# Altium PCB HIVE_BOARD_PANEL.PcbDoc
Units mm, origin at the board's own origin, x right, y up, seen from the top; angles counter-clockwise.
Board outline 280 x 155 mm, 8 copper layers (Top, GND_1, Signal_1, GND_2, PWR, Signal_2, GND_3, Bottom), stack 1.6 mm thick; 15 components, 55 nets, 12 pads, 0 vias.
Unrouted connection lines stored in the file: 24.
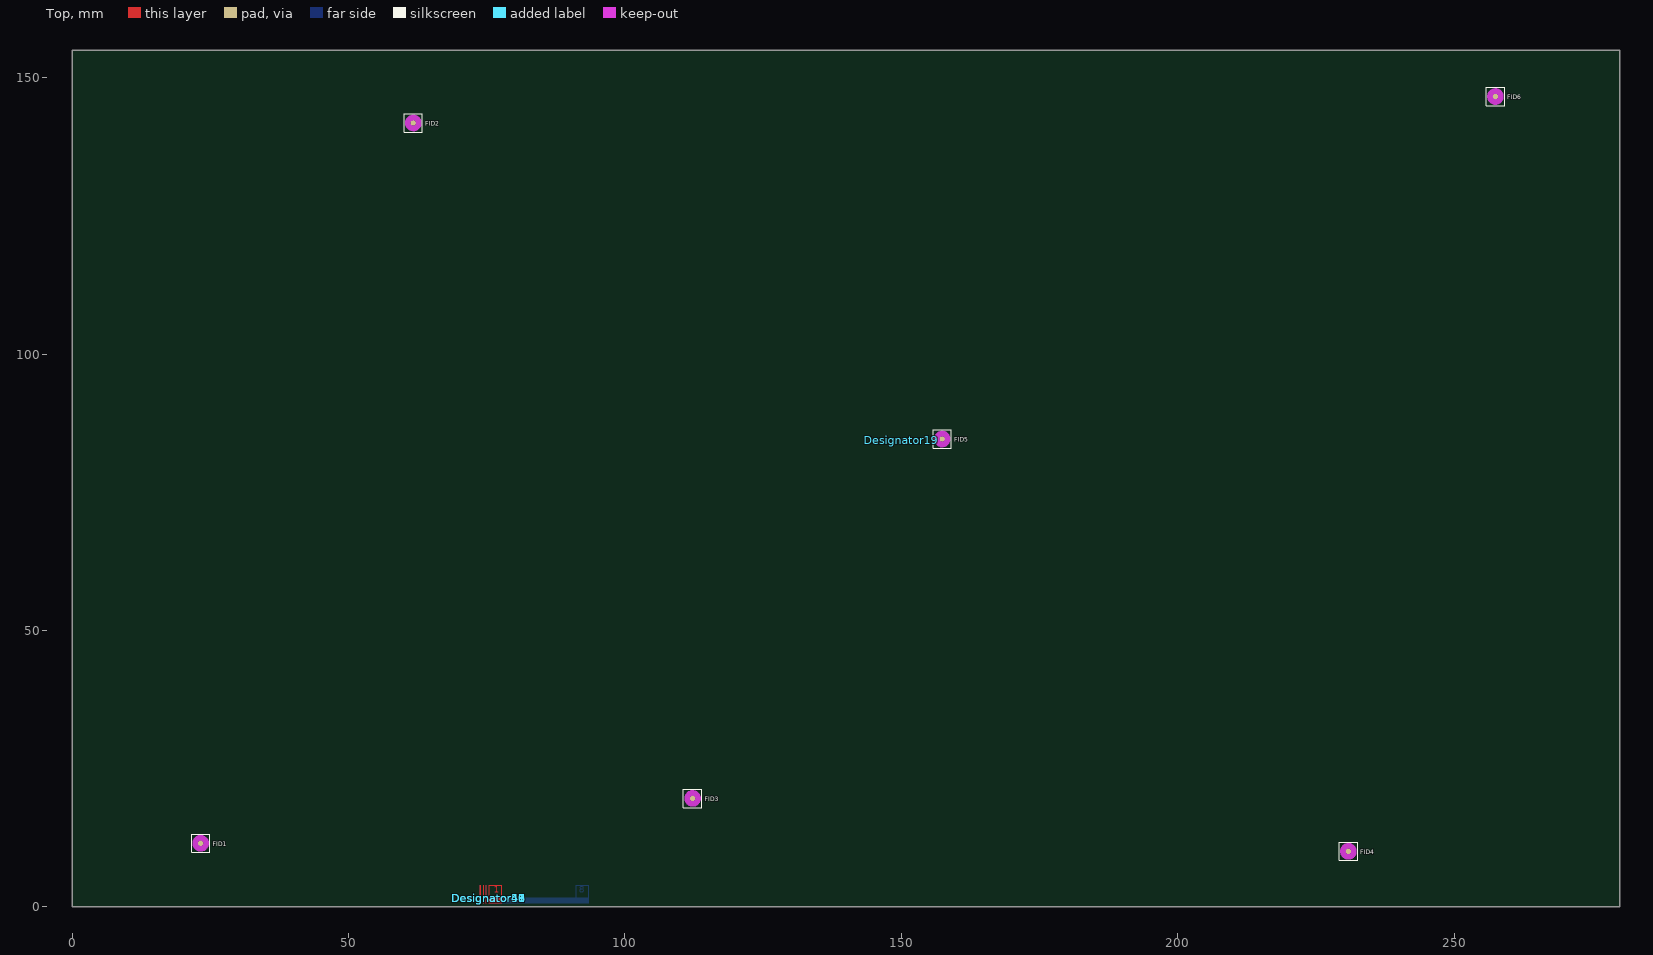
[diagram p0: Top view]
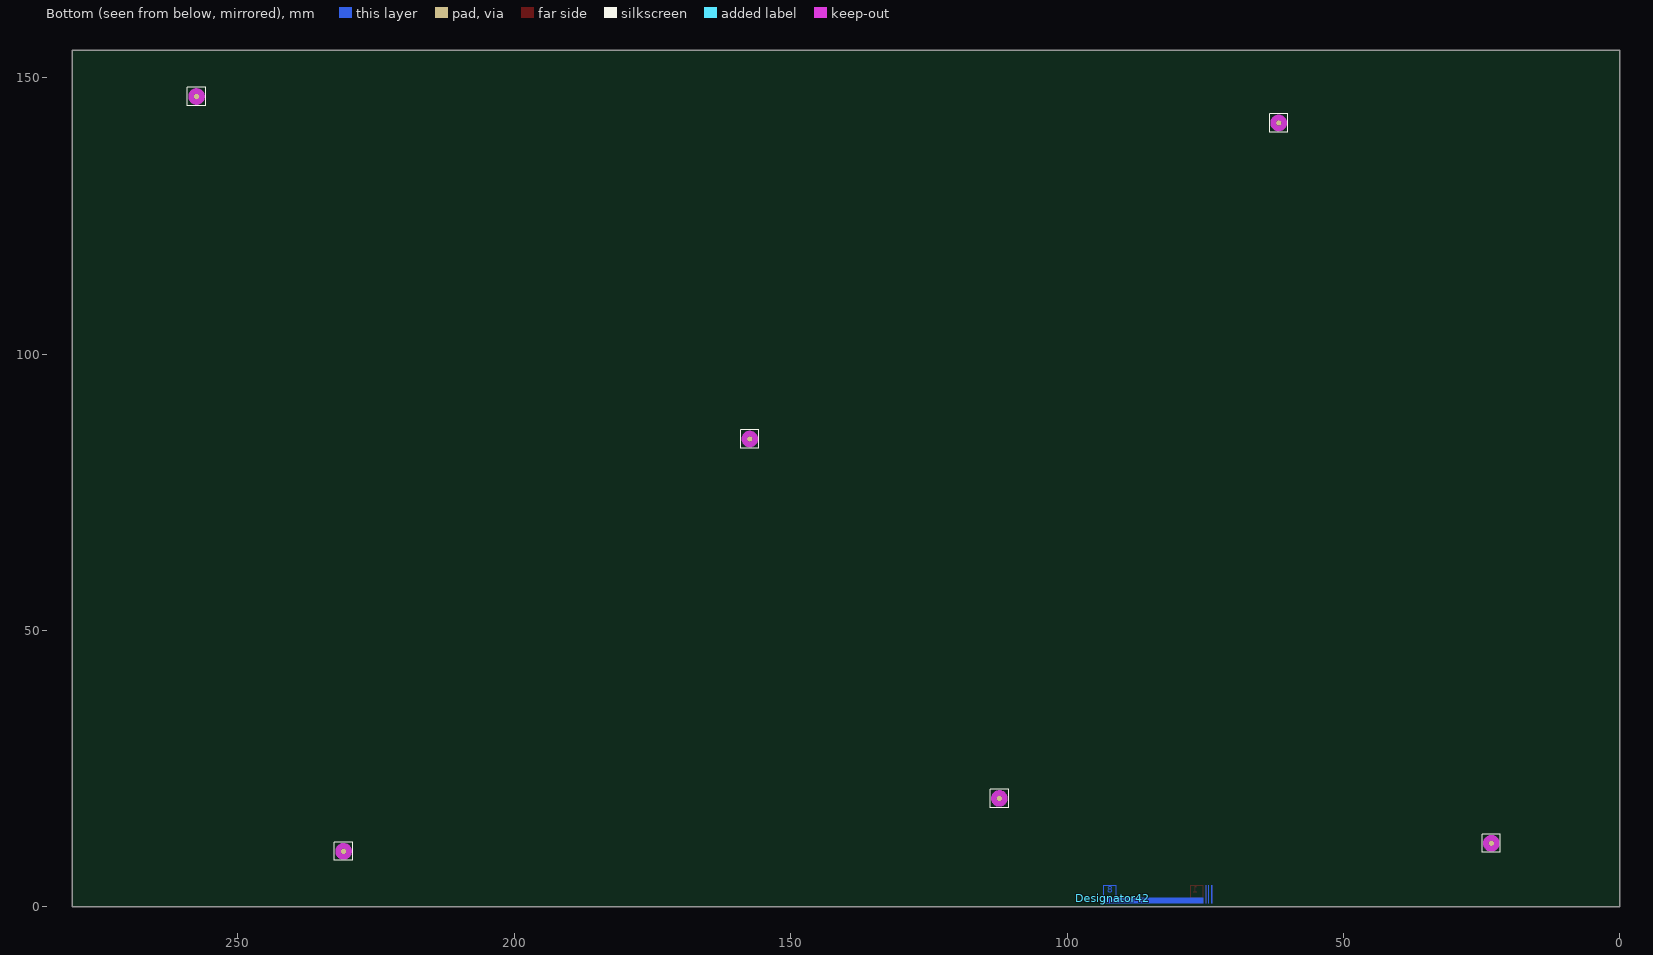
[diagram p1: Bottom view, seen from below]
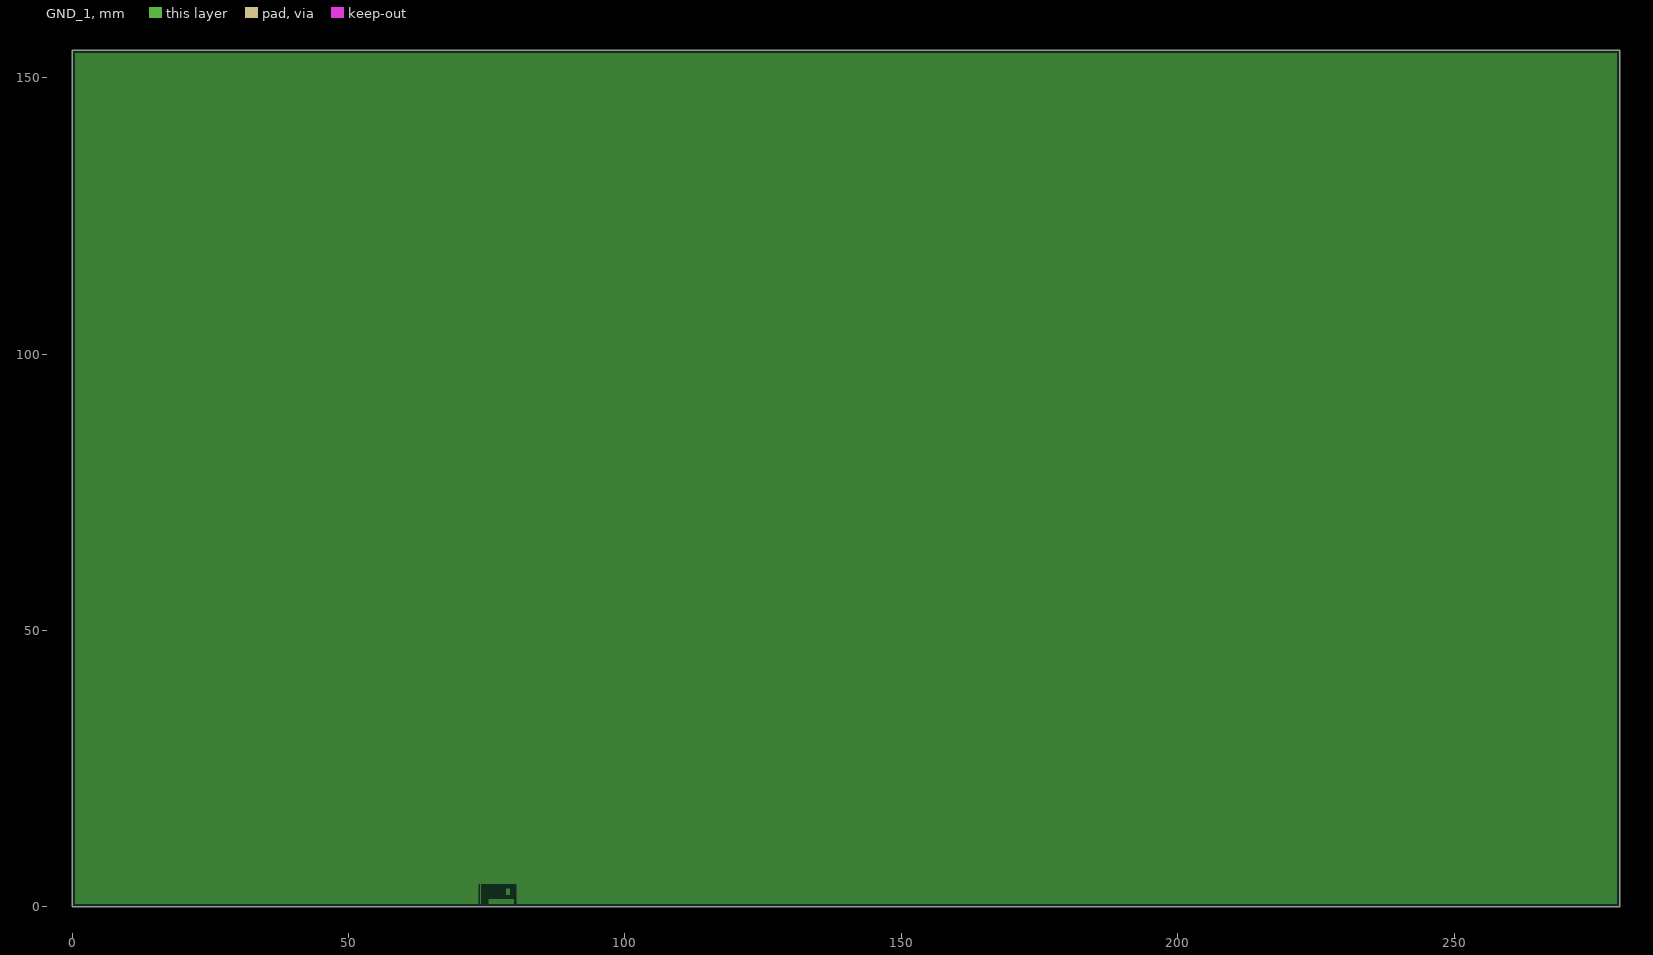
[diagram p2: GND_1, clearances drawn from the general rule]
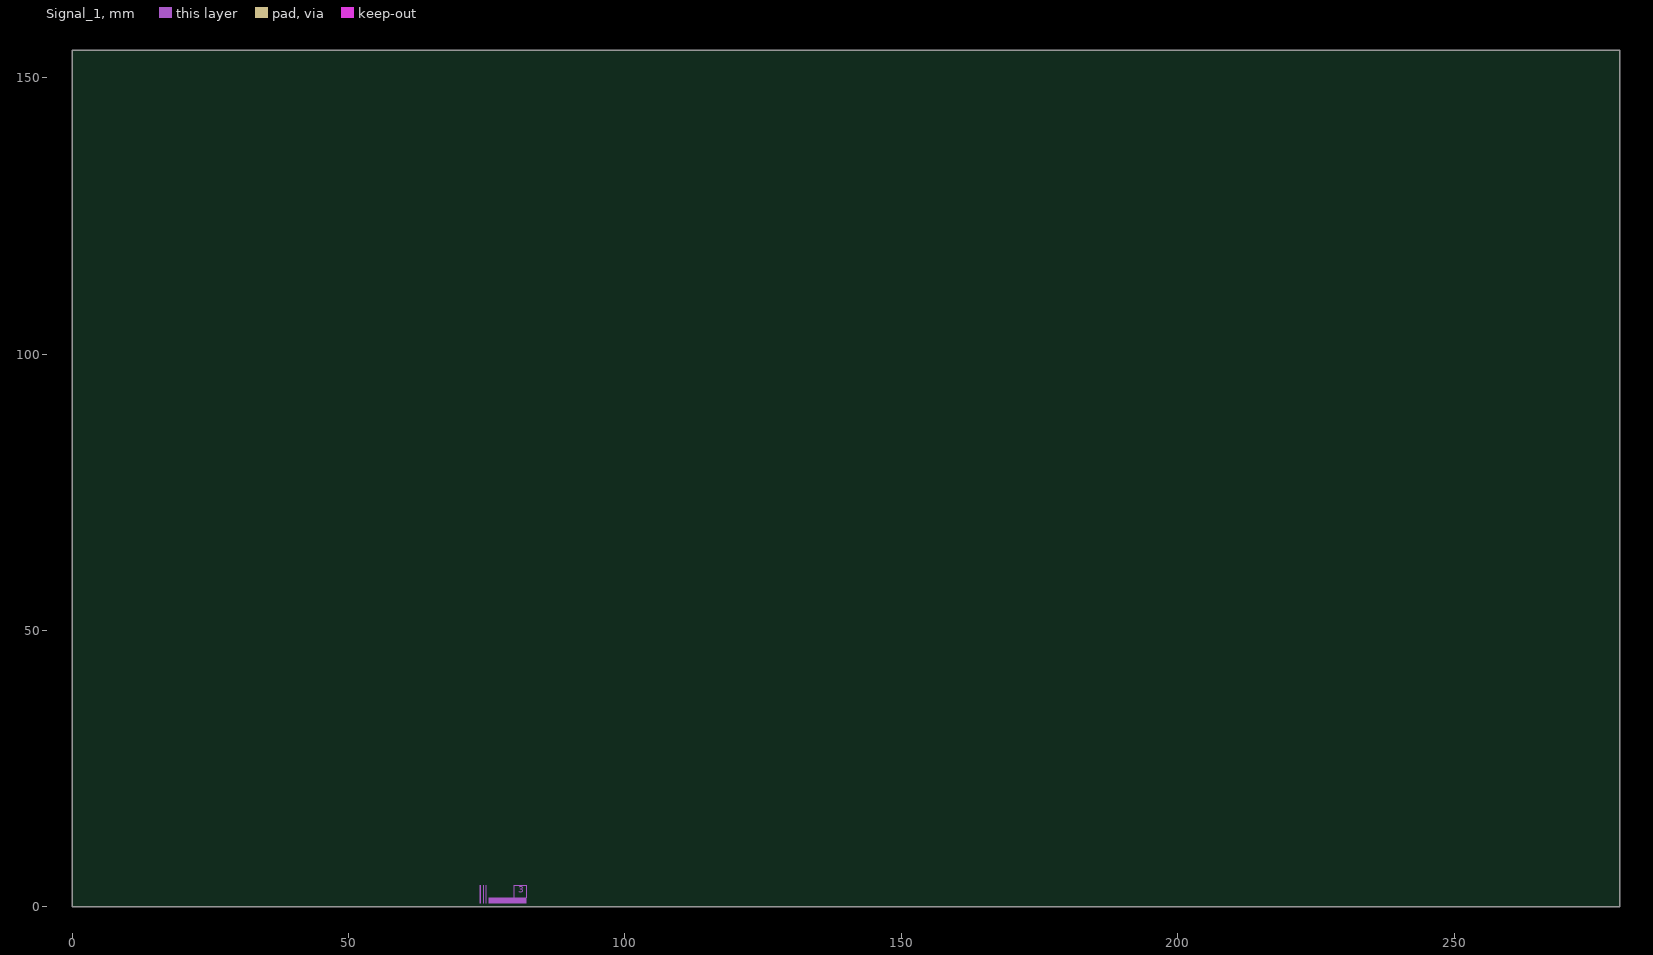
[diagram p3: Signal_1]
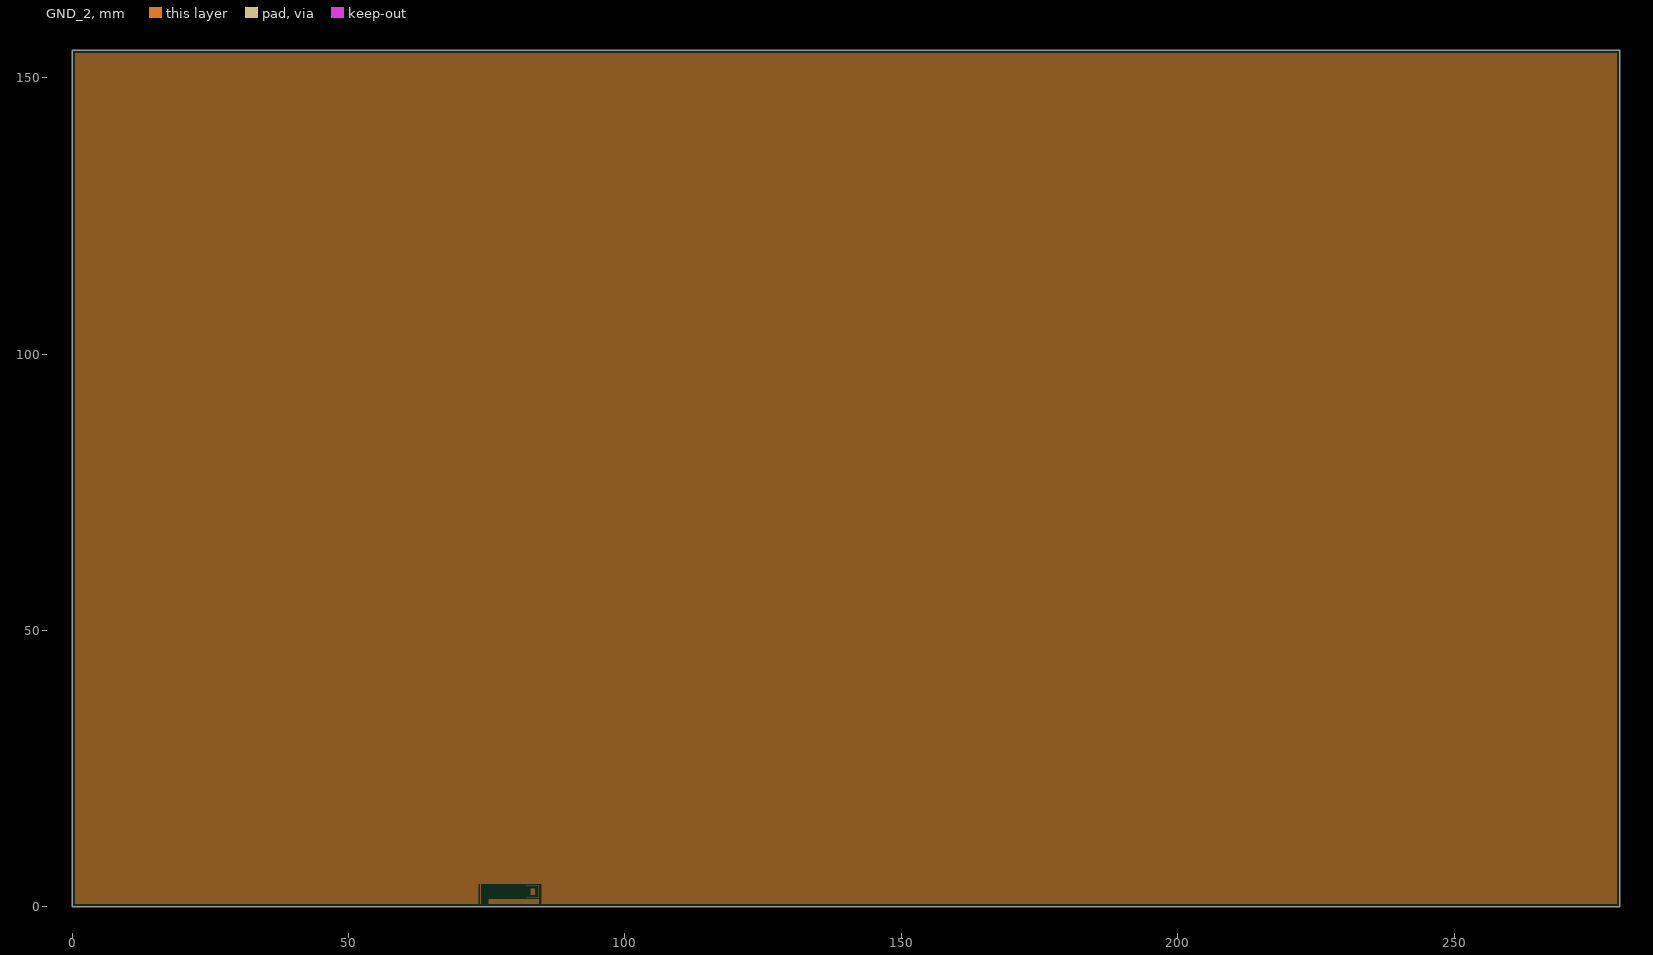
[diagram p4: GND_2, clearances drawn from the general rule]
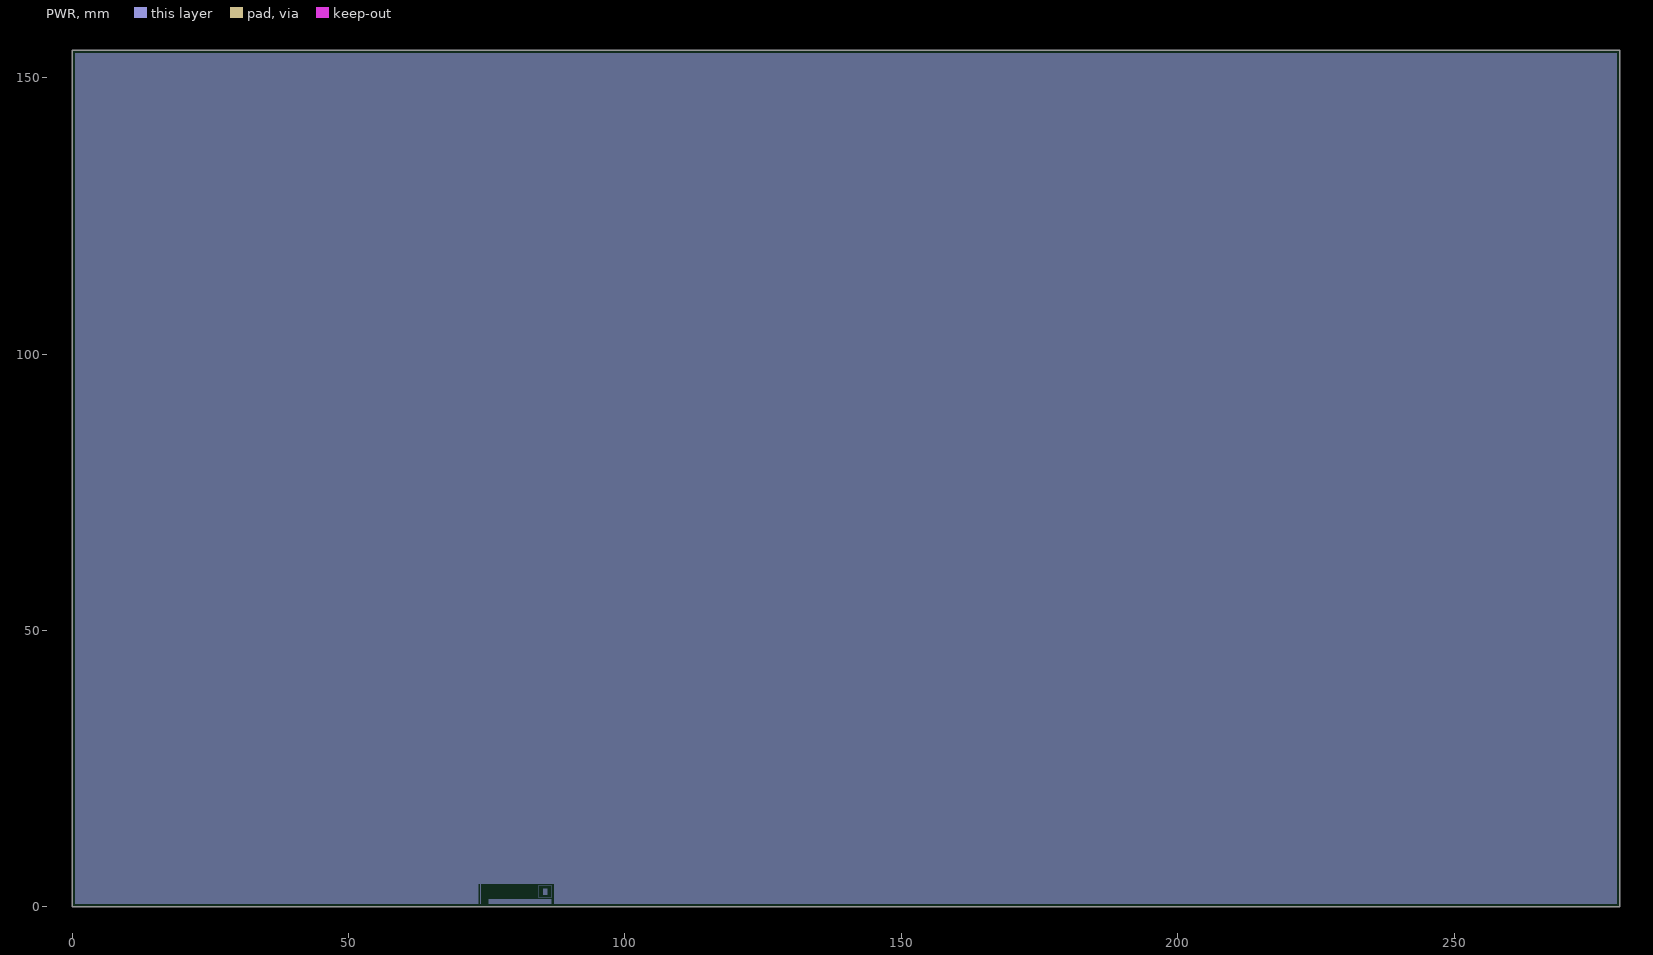
[diagram p5: PWR, clearances drawn from the general rule]
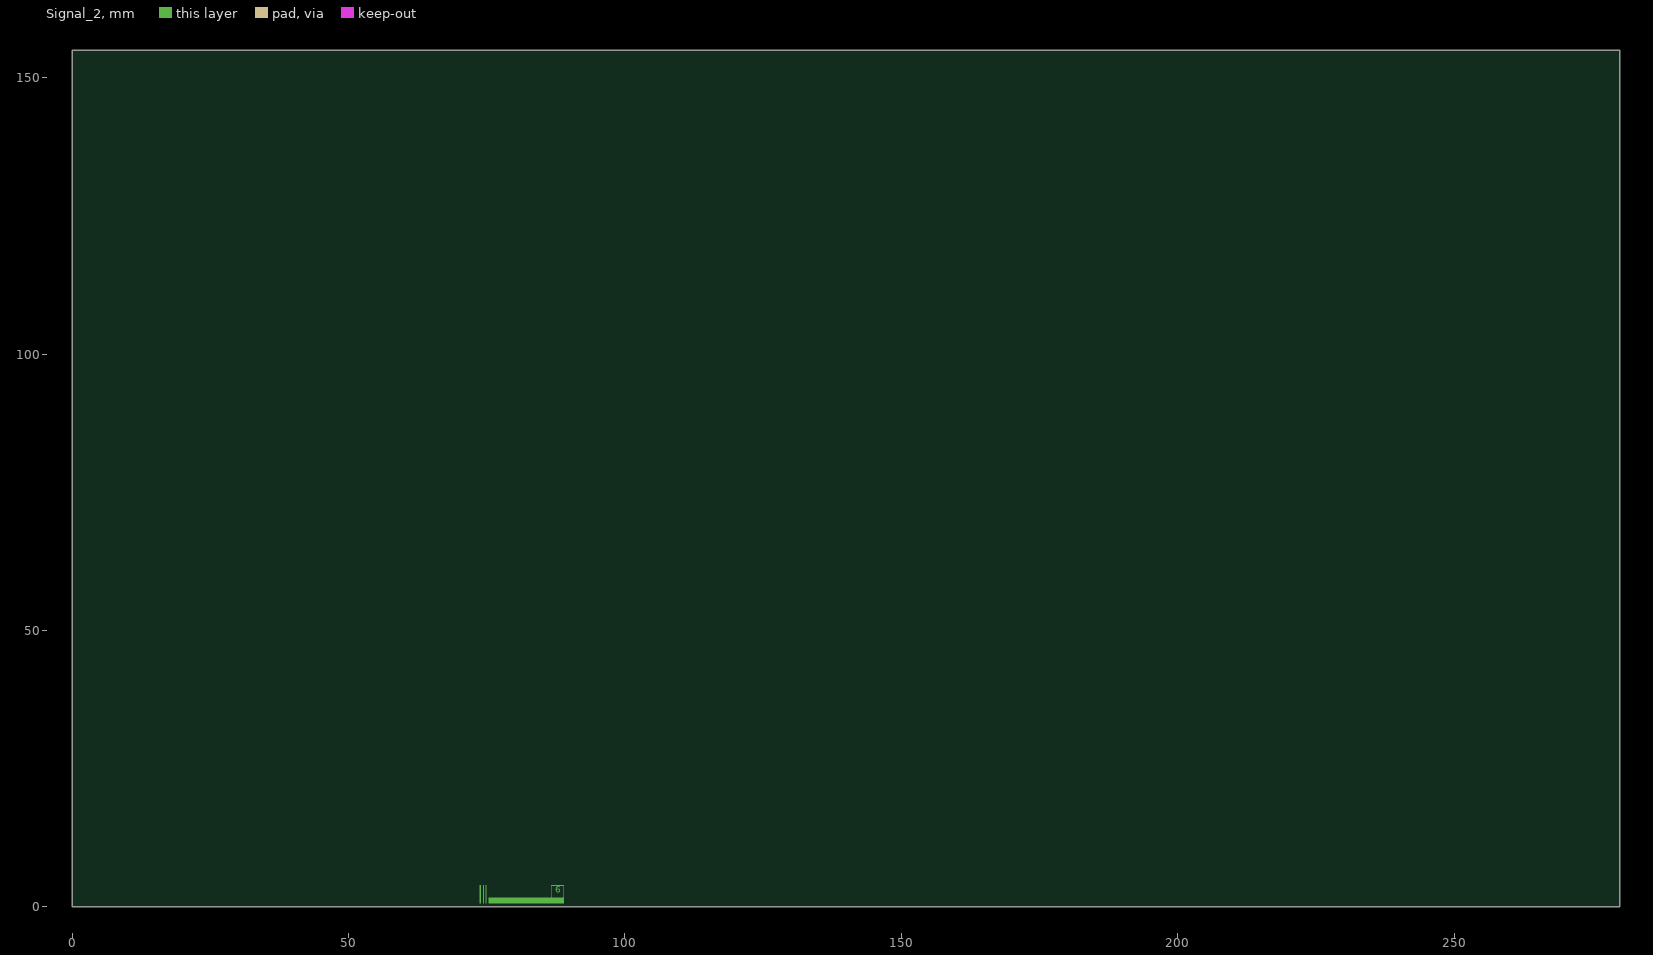
[diagram p6: Signal_2]
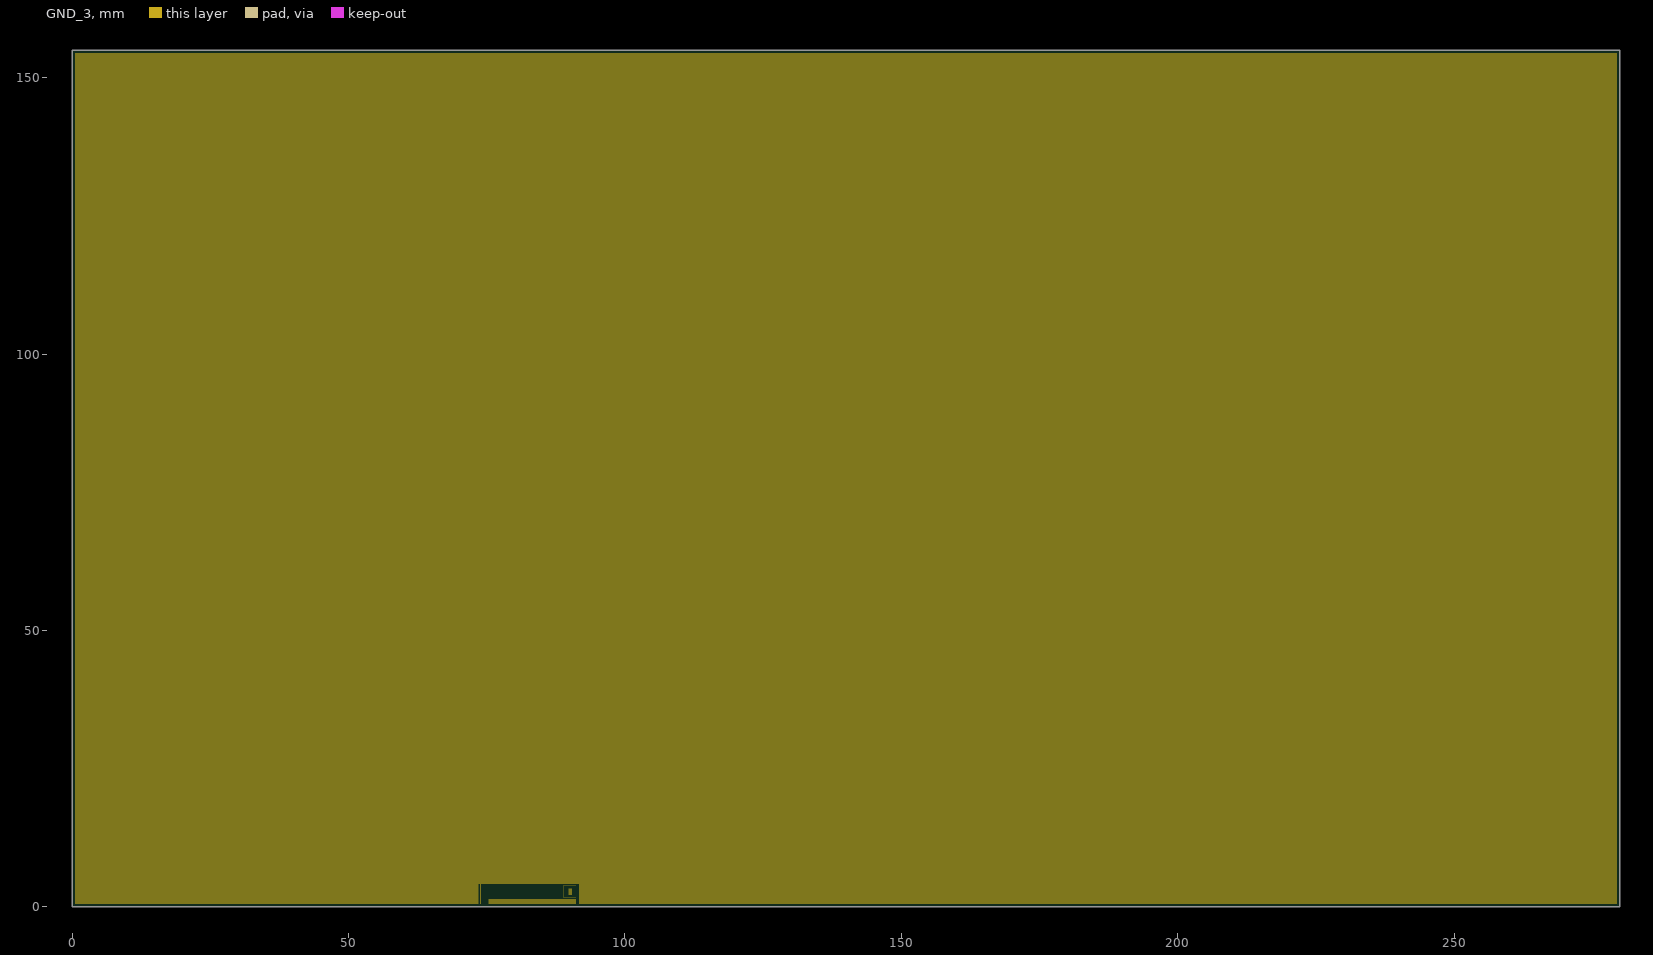
[diagram p7: GND_3, clearances drawn from the general rule]

## Layer stack, top to bottom
Top Solder: solder mask 0.0254, Solder Resist, Dk 4
Top: signal copper 0.035
Dielectric 1: prepreg 0.18, PP-006, Dk 4.29
GND_1: plane copper 0.035, net GND
Dielectric 2: core 0.2, Core-009, Dk 4.29
Signal_1: signal copper 0.035
Dielectric 3: prepreg 0.18, PP-006, Dk 4.29
GND_2: plane copper 0.035, net (Multiple Nets)
Dielectric 4: core 0.2, Core-009, Dk 4.29
PWR: plane copper 0.035, net GND
Dielectric 5: prepreg 0.18, PP-006, Dk 4.29
Signal_2: signal copper 0.035
Dielectric 6: core 0.2, Core-009, Dk 4.29
GND_3: plane copper 0.035, net GND
Dielectric 7: prepreg 0.18, PP-006, Dk 4.29
Bottom: signal copper 0.035
Bottom Solder: solder mask 0.0254, Solder Resist, Dk 4

## Board outline
0,0 0,155 280,155 280,0

## Design rules (kind name [scope] priority, off if disabled: settings)
BoardOutlineClearance BoardOutlineClearance-Silk [(OnLayer('Bottom Overlay')) OR (OnLayer('Top Overlay'))] p1: gap=0 ignorepadtopadclearanceinfootprint=FALSE
BoardOutlineClearance BoardOutlineClearance-Fiducials [InComponentClass('Fiducials')] p2: gap=0 ignorepadtopadclearanceinfootprint=FALSE
BoardOutlineClearance BoardOutlineClearance-MouseBites [InComponentClass('MouseBites')] p3: gap=0.254 ignorepadtopadclearanceinfootprint=FALSE except(0: Arc-SplitContinuation Track-SplitContinuation SMDPad-SplitContinuation THPad-OutlineEdge THPad-CavityEdge THPad-CutoutEdge THPad-SplitBarrior THPad-SplitContinuation Via-SplitContinuation Fill-SplitContinuation Poly-SplitContinuation Region-OutlineEdge Region-CavityEdge Region-CutoutEdge Region-SplitBarrior Region-SplitContinuation Text-SplitContinuation; 0.508: Arc-OutlineEdge Track-OutlineEdge SMDPad-OutlineEdge Via-OutlineEdge Fill-OutlineEdge Poly-OutlineEdge Text-OutlineEdge)
BoardOutlineClearance [All] p4: gap=0.508 ignorepadtopadclearanceinfootprint=FALSE
Clearance Clearance_KEEPOUT [IsKeepOut] p1: gap=0.102 ignorepadtopadclearanceinfootprint=FALSE except(0: Track-Fill SMDPad-Fill)
Clearance Clearance_HOLE_2_PAD [IsVia and (NOT InAnyComponent) vs IsSMTPin Or IsThruPin  or IsVia] p2: gap=0 ignorepadtopadclearanceinfootprint=FALSE except(0.051: SMDPad-Via THPad-Via; 0.152: Via-Via)
Clearance Clearance_VIA_SAME [IsVia and (NOT InAnyComponent) vs IsVia and (NOT InAnyComponent)] p3: gap=0.132 ignorepadtopadclearanceinfootprint=FALSE
Clearance Clearance_VIA [IsVia AND (InAnyComponent) vs IsVia AND (InAnyComponent)] p4: gap=0.31 ignorepadtopadclearanceinfootprint=FALSE
Clearance Clearance_GEN [All] p5: gap=0.102 ignorepadtopadclearanceinfootprint=FALSE
ComponentClearance ComponentClearance_KEEPOUT [IsKeepOut] p1: gap=0.025 collisioncheckmode=3 verticalgap=0.025 showdistances=FALSE
ComponentClearance ComponentClearance_headers [HasFootprint('CON_JMP_SNT-100-BK-T-H') OR HasFootprint('THE_HS_ATS-CPX025025015-138-C2-R0_NOMH')] p2: gap=0 collisioncheckmode=3 verticalgap=0 showdistances=FALSE
ComponentClearance [All] p3: gap=0.102 collisioncheckmode=3 verticalgap=0.102 showdistances=FALSE
DiffPairsRouting DIFF_100_OHM [InDifferentialPairClass('DIFF_100')] p1: maxlimit=0.203 minlimit=0.127 mostfreqgap=0.203 toplayer_maxgap=0.127 toplayer_prefgap=0.127 toplayer_minwidth=0.127 toplayer_maxwidth=0.127 toplayer_prefwidth=0.127 midlayer1_mingap=0.203 midlayer1_minwidth=0.102 midlayer1_maxwidth=0.102 midlayer1_prefwidth=0.102 midlayer2_mingap=0.203 midlayer2_minwidth=0.102 midlayer2_maxwidth=0.102 midlayer2_prefwidth=0.102 bottomlayer_maxgap=0.127 bottomlayer_prefgap=0.127 bottomlayer_minwidth=0.127 bottomlayer_maxwidth=0.127 bottomlayer_prefwidth=0.127 maxuncoupledlength=12.7
DiffPairsRouting DIFF_90_OHM [InDifferentialPairClass('DIFF_90')] p2: maxlimit=0.178 minlimit=0.127 mostfreqgap=0.178 toplayer_maxgap=0.127 toplayer_prefgap=0.127 toplayer_minwidth=0.191 toplayer_maxwidth=0.191 toplayer_prefwidth=0.191 midlayer1_mingap=0.178 midlayer1_minwidth=0.127 midlayer1_maxwidth=0.127 midlayer1_prefwidth=0.127 midlayer2_mingap=0.178 midlayer2_minwidth=0.127 midlayer2_maxwidth=0.127 midlayer2_prefwidth=0.127 bottomlayer_maxgap=0.127 bottomlayer_prefgap=0.127 bottomlayer_minwidth=0.191 bottomlayer_maxwidth=0.191 bottomlayer_prefwidth=0.191 maxuncoupledlength=12.7
DiffPairsRouting DIFF_85_OHM [InDifferentialPairClass('DIFF_85')] p3: maxlimit=0.14 minlimit=0.127 mostfreqgap=0.14 toplayer_maxgap=0.127 toplayer_prefgap=0.127 toplayer_minwidth=0.216 toplayer_maxwidth=0.216 toplayer_prefwidth=0.216 midlayer1_mingap=0.14 midlayer1_minwidth=0.127 midlayer1_maxwidth=0.127 midlayer1_prefwidth=0.127 midlayer2_mingap=0.14 midlayer2_minwidth=0.127 midlayer2_maxwidth=0.127 midlayer2_prefwidth=0.127 bottomlayer_maxgap=0.127 bottomlayer_prefgap=0.127 bottomlayer_minwidth=0.216 bottomlayer_maxwidth=0.216 bottomlayer_prefwidth=0.216 maxuncoupledlength=12.7
HoleSize [All] p1: absolutevalues=TRUE maxlimit=6.5 minlimit=0.2 maxpercent=80.000 minpercent=20.000
HoleToHoleClearance HoleToHoleClearance_Via [All] p1: gap=0.203 allowstackedmicrovias=TRUE
MatchedLengths "LENGTH CLK_CHAN" [InNetClass('CLK_CHAN')] p1: tolerance=0.025 checknetsindiffpair=FALSE checkdiffpairvsdiffpair=TRUE checkxsignals=TRUE checkothers=TRUE
MatchedLengths "LENGTH SYNC" [InNetClass('SYNC_FAN')] p2: tolerance=0.025 checknetsindiffpair=FALSE checkdiffpairvsdiffpair=TRUE checkxsignals=TRUE checkothers=TRUE
MatchedLengths "LENGTH CLK" [InNetClass('CLK_FAN')] p3: tolerance=0.025 checknetsindiffpair=FALSE checkdiffpairvsdiffpair=TRUE checkxsignals=TRUE checkothers=TRUE
MatchedLengths DiffMatching_WithinPair [InDifferentialPairClass('All Differential Pairs')] p4: tolerance=0.076 checknetsindiffpair=TRUE checkdiffpairvsdiffpair=FALSE checkxsignals=FALSE checkothers=FALSE
MinimumAnnularRing [All] p1: minimumring=0.15
MinimumSolderMaskSliver [All] p1: minsoldermaskwidth=0.1
PasteMaskExpansion [All] p1: expansion=-0.025
PlaneClearance [All] p1: clearance=0.152
PlaneConnect PlaneConnect_PWR_IN [InNet('5V_CONN') OR InNet('5V_USB')] p1: pad.planeconnectstyle=Relief pad.reliefexpansion=0.508 pad.reliefentries=4 pad.reliefconductorwidth=1 pad.reliefairgap=0.254 via.planeconnectstyle=Direct via.reliefexpansion=0.508 via.reliefentries=4 via.reliefconductorwidth=0.254 via.reliefairgap=0.254
PlaneConnect [All] p2: pad.planeconnectstyle=Relief pad.reliefexpansion=0.508 pad.reliefentries=4 pad.reliefconductorwidth=0.5 pad.reliefairgap=0.254 via.planeconnectstyle=Direct via.reliefexpansion=0.508 via.reliefentries=4 via.reliefconductorwidth=0.254 via.reliefairgap=0.254
PolygonConnect PolygonConnect_DIR [(HasFootprint('CON_HDR_PREC008DAAN-RC')OR InNet('NetF1_1'))AND OnLayer('Top')] p1: connectstyle=Direct reliefconductorwidth=0.254 reliefentries=4 polygonreliefangle="90 Angle" airgapwidth=0.254
PolygonConnect PolygonConnect_PWR_IN [(InNet('5V_CONN') OR InNet('5V_USB'))] p2: thpad.connectstyle=Relief thpad.reliefconductorwidth=1 thpad.reliefentries=4 thpad.polygonreliefangle="90 Angle" thpad.airgapwidth=0.254 smdpad.connectstyle=Direct smdpad.reliefconductorwidth=1 smdpad.reliefentries=4 smdpad.polygonreliefangle="90 Angle" smdpad.airgapwidth=0.254 via.connectstyle=Direct via.reliefconductorwidth=1 via.reliefentries=4 via.polygonreliefangle="90 Angle" via.airgapwidth=0.254
PolygonConnect [All] p3: thpad.connectstyle=Relief thpad.reliefconductorwidth=0.5 thpad.reliefentries=4 thpad.polygonreliefangle="90 Angle" thpad.airgapwidth=0.254 smdpad.connectstyle=Direct smdpad.reliefconductorwidth=0.254 smdpad.reliefentries=4 smdpad.polygonreliefangle="90 Angle" smdpad.airgapwidth=0.254 via.connectstyle=Direct via.reliefconductorwidth=0.254 via.reliefentries=4 via.polygonreliefangle="90 Angle" via.airgapwidth=0.254
RoomDefinition CHAN_C [(InComponentClass('CHAN 0C + 1C')) AND NOT (HasFootprint('TVS_PWR_SMBJ5.0CA') OR HasFootprint('CON_USB_3.2_TypeC_12401598E4#2A')OR HasFootprint('TVS_DATA_DT1140-04LP-7')OR HasFootprint('RES_0603'))] p1: confinementstyle=ConfineIn formatcopy=TRUE lockcomponents=FALSE outline 95.963,91.62 131.963,91.62 131.963,117.915 95.963,117.915
RoomDefinition CHAN_B [(InComponentClass('CHAN 0B + 1B')) AND NOT (HasFootprint('TVS_PWR_SMBJ5.0CA') OR HasFootprint('CON_USB_3.2_TypeC_12401598E4#2A')OR HasFootprint('TVS_DATA_DT1140-04LP-7')OR HasFootprint('RES_0603'))] p2: confinementstyle=ConfineIn formatcopy=TRUE lockcomponents=FALSE outline 59.963,91.62 95.963,91.62 95.963,117.915 59.963,117.915
RoomDefinition CHAN_A [(InComponentClass('CHAN 0A + 1A')) AND NOT (HasFootprint('TVS_PWR_SMBJ5.0CA') OR HasFootprint('CON_USB_3.2_TypeC_12401598E4#2A')OR HasFootprint('TVS_DATA_DT1140-04LP-7')OR HasFootprint('RES_0603'))] p3: confinementstyle=ConfineIn formatcopy=TRUE lockcomponents=FALSE outline 23.963,91.62 59.963,91.62 59.963,117.915 23.963,117.915
RoutingVias [All] p1: holewidth=0.2 width=0.55 viastyle="Through Hole" minholewidth=0.2 minwidth=0.5 maxholewidth=6.5 maxwidth=7.5
SilkToSilkClearance [All] p1: silktosilkclearance=0.025
SilkToSolderMaskClearance [IsPad] p1: minsilkscreentomaskgap=0.025 clearancetoexposedcopper=FALSE
SolderMaskExpansion SolderMaskExpansion_VIA [IsVia] p1: expansion=0.102 istentingtop=TRUE
SolderMaskExpansion [All] p2: expansion=0.07 istentingtop=FALSE
UnRoutedNet [All] p1: checkbadconnections=TRUE
Width Width_50_OHM [InNetClass('SE_50')] p1: maxlimit=0.305 minlimit=0.152 preferedwidth=0.305 toplayer_minwidth=0.305 midlayer1_maxwidth=0.152 midlayer1_prefwidth=0.152 midlayer2_maxwidth=0.152 midlayer2_prefwidth=0.152 bottomlayer_minwidth=0.305 minimp=50.000000 maximp=50.000000 favimp=50.000000
Width [All] p2: maxlimit=2.54 minlimit=0.102 preferedwidth=0.305 midlayer1_prefwidth=0.152 midlayer2_prefwidth=0.152 minimp=50.000000 maximp=50.000000 favimp=50.000000
19 further rules are at their usual default settings.

## Classes and differential pairs
net class HighSpeedDiff: M1_CLK_N M1_CLK_P M1_CMD_IN_N M1_CMD_IN_P M1_CMD_OUT_N M1_CMD_OUT_P M1_HSL_N M1_HSL_P M1_SYNC_N M1_SYNC_P M2_CLK_N M2_CLK_P M2_CMD_IN_N M2_CMD_IN_P M2_CMD_OUT_N M2_CMD_OUT_P M2_HSL_N M2_HSL_P M2_SYNC_N M2_SYNC_P
net class HV: -HV M1_SOURCE_-HV_A M1_SOURCE_-HV_B M2_SOURCE_-HV_A M2_SOURCE_-HV_B
differential pair M2_SYNC: +M2_SYNC_P -M2_SYNC_N
differential pair M2_HSL: +M2_HSL_P -M2_HSL_N
differential pair M2_CMD_OUT: +M2_CMD_OUT_P -M2_CMD_OUT_N
differential pair M2_CMD_IN: +M2_CMD_IN_P -M2_CMD_IN_N
differential pair M2_CLK: +M2_CLK_P -M2_CLK_N
differential pair M1_SYNC: +M1_SYNC_P -M1_SYNC_N
differential pair M1_HSL: +M1_HSL_P -M1_HSL_N
differential pair M1_CMD_OUT: +M1_CMD_OUT_P -M1_CMD_OUT_N
differential pair M1_CMD_IN: +M1_CMD_IN_P -M1_CMD_IN_N
differential pair M1_CLK: +M1_CLK_P -M1_CLK_N

## Components (designator, comment, footprint, x,y, rotation, side; value= is the part's Value field where it differs from the comment)
Designator19 "Comment" STN_STENCIL_TOP_FRAMEWORK_420X520MM 150,84.414 r0 top
Designator41 "Comment" LYR-MARKER-SIGNAL-1 75.373,1.592 r0 top
Designator42 "Comment" LYR-MARKER-SIGNAL-8 91.723,1.592 r180 bottom
Designator46 "Comment" LYR-MARKER-PLANE-2 75.373,1.574 r0 top
Designator46 "Comment" LYR-MARKER-PLANE-4 75.373,1.592 r0 top
Designator47 "Comment" LYR-MARKER-PLANE-5 75.373,1.592 r0 top
Designator48 "Comment" LYR-MARKER-SIGNAL-3 75.373,1.592 r0 top
Designator49 "Comment" LYR-MARKER-PLANE-7 75.373,1.592 r0 top
Designator51 "Comment" LYR-MARKER-SIGNAL-6 75.373,1.592 r0 top
FID1 "Comment" "FID_CIRCLE_1MM - PASTE_MASK" 23.268,11.513 r180 top
FID2 "Comment" "FID_CIRCLE_1MM - PASTE_MASK" 61.73,141.805 r180 top
FID3 "Comment" "FID_CIRCLE_1MM - PASTE_MASK" 112.254,19.621 r180 top
FID4 "Comment" "FID_CIRCLE_1MM - PASTE_MASK" 230.884,10.056 r180 top
FID5 "Comment" "FID_CIRCLE_1MM - PASTE_MASK" 157.393,84.64 r180 top
FID6 "Comment" "FID_CIRCLE_1MM - PASTE_MASK" 257.472,146.591 r180 top

## Footprints (in the part's own frame and the unit in brackets; to place one, negate y for a bottom-side part, rotate by r counter-clockwise, add the part's x,y. Pads: shape width x height; smd on the part's side, far side on the other; paste and mask are expansions set on the pad)
"FID_CIRCLE_1MM - PASTE_MASK" [mm]
  round 1 smd paste-1 mask+1: 1(0,0)
  round 1 smd far side paste-1 mask+1: 2(0,0)
  Top keep-out circle w1: c0,0 r1
  Bottom keep-out circle w1: c0,0 r1
  silkscreen extent -1.65,-1.65 1.65,1.65
LYR-MARKER-PLANE-2 [mm]
  GND_1 region: 4.5,2.25 3.923,2.25 3.923,0.125 4.5,0.125
  GND_1 region: -1.8,-1 -1.627,-1 -1.627,2.5 -1.8,2.5
  GND_1 region: -1.373,-1 -1.026,-1 -1.026,2.5 -1.373,2.5
  GND_1 region: -0.874,-1 -0.551,-1 -0.551,2.5 -0.874,2.5
  GND_1 region: -0.449,-1 -0.125,-1 -0.125,2.5 -0.449,2.5
  GND_1 region: -0.125,-0.125 2.25,-0.125 2.25,2.5 -0.125,2.5
  GND_1 region: 4.625,-1 5,-1 5,2.5 4.625,2.5
  GND_1 region: 4.75,2.375 4.75,2.5 2.125,2.5 2.125,2.375
  GND_1 region: 2.375,0.125 3.103,0.125 3.103,2.25 2.375,2.25
  GND_1 region: 4.5,1.83 4.5,2.25 2.375,2.25 2.375,1.83
  GND_1 region: 2.375,0.552 2.375,0.125 4.5,0.125 4.5,0.552
  GND_1 region: 2.125,-0.125 2.25,-0.125 2.25,2.5 2.125,2.5
  GND_1 region: 4.75,-0.125 4.75,0 2.125,0 2.125,-0.125
LYR-MARKER-PLANE-4 [mm]
LYR-MARKER-PLANE-5 [mm]
  PWR region: 11.375,-1 11.75,-1 11.75,2.5 11.375,2.5
  PWR region: -0.449,-1 -0.125,-1 -0.125,2.5 -0.449,2.5
  PWR region: -0.874,-1 -0.551,-1 -0.551,2.5 -0.874,2.5
  PWR region: -1.373,-1 -1.026,-1 -1.026,2.5 -1.373,2.5
  PWR region: -1.8,-1 -1.627,-1 -1.627,2.5 -1.8,2.5
  PWR region: 11.5,2.375 11.5,2.5 8.875,2.5 8.875,2.375
  PWR region: 11.25,1.83 11.25,2.25 9.125,2.25 9.125,1.83
  PWR region: 9.125,0.552 9.125,0.125 11.25,0.125 11.25,0.552
  PWR region: 11.5,-0.125 11.5,0 8.875,0 8.875,-0.125
  PWR region: -0.125,-0.125 8.895,-0.125 8.895,2.5 -0.125,2.5
  PWR region: 8.875,-0.125 9,-0.125 9,2.5 8.875,2.5
  PWR region: 9.125,0.125 9.808,0.125 9.808,2.25 9.125,2.25
  PWR region: 11.25,2.25 10.654,2.25 10.654,0.125 11.25,0.125
LYR-MARKER-PLANE-7 [mm] "7"
  GND_3 region: 15.875,-1 16.25,-1 16.25,2.5 15.875,2.5
  GND_3 region: -0.449,-1 -0.125,-1 -0.125,2.5 -0.449,2.5
  GND_3 region: -0.874,-1 -0.551,-1 -0.551,2.5 -0.874,2.5
  GND_3 region: -1.373,-1 -1.026,-1 -1.026,2.5 -1.373,2.5
  GND_3 region: -1.8,-1 -1.627,-1 -1.627,2.5 -1.8,2.5
  GND_3 region: 13.375,-0.125 13.5,-0.125 13.5,2.5 13.375,2.5
  GND_3 region: 13.625,0.125 14.353,0.125 14.353,2.25 13.625,2.25
  GND_3 region: -0.125,-0.125 13.398,-0.125 13.398,2.5 -0.125,2.5
  GND_3 region: 16,2.375 16,2.5 13.375,2.5 13.375,2.375
  GND_3 region: 15.75,1.83 15.75,2.25 13.625,2.25 13.625,1.83
  GND_3 region: 15.75,2.25 15.148,2.25 15.148,0.125 15.75,0.125
  GND_3 region: 13.625,0.552 13.625,0.125 15.75,0.125 15.75,0.552
  GND_3 region: 16,-0.125 16,0 13.375,0 13.375,-0.125
LYR-MARKER-SIGNAL-1 [mm]
  Top region: 2.25,0 2.375,0 2.375,2.375 2.25,2.375
  Top region: 0,0.125 0,-1 2.375,-1 2.375,0.125
  Top region: 2.375,2.375 2.25,2.375 2.25,0 2.375,0
  Top region: 2.375,2.25 2.375,2.375 0,2.375 0,2.25
  Top region: 0,0 0.125,0 0.125,2.375 0,2.375
  Top region: -1.627,-1 -1.373,-1 -1.373,2.375 -1.627,2.375
  Top region: -1.026,-1 -0.874,-1 -0.874,2.375 -1.026,2.375
  Top region: -0.551,-1 -0.449,-1 -0.449,2.375 -0.551,2.375
  Top pour cut-out: -1.9,2.5 -1.9,-1 2.5,-1 2.5,2.5
LYR-MARKER-SIGNAL-3 [mm]
  Signal_1 region: 6.75,0 6.875,0 6.875,2.375 6.75,2.375
  Signal_1 region: 6.875,2.25 6.875,2.375 4.5,2.375 4.5,2.25
  Signal_1 region: 6.875,2.375 6.75,2.375 6.75,0 6.875,0
  Signal_1 region: 0,0.125 0,-1 6.875,-1 6.875,0.125
  Signal_1 region: 4.625,2.375 4.5,2.375 4.5,0 4.625,0
  Signal_1 region: -0.551,-1 -0.449,-1 -0.449,2.375 -0.551,2.375
  Signal_1 region: -1.026,-1 -0.874,-1 -0.874,2.375 -1.026,2.375
  Signal_1 region: -1.627,-1 -1.373,-1 -1.373,2.375 -1.627,2.375
  Signal_1 pour cut-out: -1.8,2.5 -1.8,-1 7,-1 7,2.5
LYR-MARKER-SIGNAL-6 [mm]
  Signal_2 region: -1.627,-1 -1.373,-1 -1.373,2.375 -1.627,2.375
  Signal_2 region: -1.026,-1 -0.874,-1 -0.874,2.375 -1.026,2.375
  Signal_2 region: -0.551,-1 -0.449,-1 -0.449,2.375 -0.551,2.375
  Signal_2 region: 0,0.125 0,-1 13.625,-1 13.625,0.125
  Signal_2 region: 13.625,2.375 13.5,2.375 13.5,0 13.625,0
  Signal_2 region: 13.625,2.25 13.625,2.375 11.25,2.375 11.25,2.25
  Signal_2 region: 11.25,0 11.375,0 11.375,2.375 11.25,2.375
  Signal_2 region: 13.5,0 13.625,0 13.625,2.375 13.5,2.375
  Signal_2 pour cut-out: -1.8,2.5 -1.8,-1 13.75,-1 13.75,2.5
LYR-MARKER-SIGNAL-8 [mm]
  Top region: 16.35,0.125 16.35,-1 -1.775,-1 -1.775,0.125
  Top region: -1.775,2.25 -1.775,2.375 0.6,2.375 0.6,2.25
  Top region: -1.775,2.375 -1.65,2.375 -1.65,0 -1.775,0
  Top region: 0.475,2.375 0.6,2.375 0.6,0 0.475,0
  Top region: 16.799,2.375 16.901,2.375 16.901,-1 16.799,-1
  Top region: 17.224,2.375 17.376,2.375 17.376,-1 17.224,-1
  Top region: 17.723,2.375 17.977,2.375 17.977,-1 17.723,-1
  Top pour cut-out: -1.8,2.5 -1.8,-1 18.25,-1 18.25,2.5
STN_STENCIL_TOP_FRAMEWORK_420X520MM [mm] "MEC - STENCIL PASTE FRAMEWORK"
  body extent -260,-210 -258,-208

## Nets (pads, with @x,y where several pads share a name; then routed paths per layer and width w, separated by ;. In a path a pad name is that pad's centre, name@x,y a point inside that pad or via, vN(x,y) a via of type N, cw(c..) or ccw(c..) an arc to the next point about the centre after c; other vN are vias at no path point)
2V5: 
-HV: 
-HV_MID: 
ADAPTER_BOARD_ID: 
GND: 
M1_1V8_A_LDO_IN: 
M1_1V8_A_LDO_OUT: 
M1_1V8_ANALOG: 
M1_1V8_D_LDO_IN: 
M1_1V8_D_LDO_OUT: 
M1_1V8_DIGITAL: 
M1_CLK_N: 
M1_CLK_P: 
M1_CMD_IN_N: 
M1_CMD_IN_P: 
M1_CMD_OUT_N: 
M1_CMD_OUT_P: 
M1_DRAIN_PI_A: 
M1_DRAIN_PI_B: 
M1_GRILLE_PI_A: 
M1_GRILLE_PI_B: 
M1_HSL_N: 
M1_HSL_P: 
M1_RST: 
M1_SORTIE_PI_A: 
M1_SORTIE_PI_B: 
M1_SOURCE_-HV_A: 
M1_SOURCE_-HV_B: 
M1_SYNC_N: 
M1_SYNC_P: 
M2_1V8_A_LDO_IN: 
M2_1V8_A_LDO_OUT: 
M2_1V8_ANALOG: 
M2_1V8_D_LDO_IN: 
M2_1V8_D_LDO_OUT: 
M2_1V8_DIGITAL: 
M2_CLK_N: 
M2_CLK_P: 
M2_CMD_IN_N: 
M2_CMD_IN_P: 
M2_CMD_OUT_N: 
M2_CMD_OUT_P: 
M2_DRAIN_PI_A: 
M2_DRAIN_PI_B: 
M2_GRILLE_PI_A: 
M2_GRILLE_PI_B: 
M2_HSL_N: 
M2_HSL_P: 
M2_RST: 
M2_SORTIE_PI_A: 
M2_SORTIE_PI_B: 
M2_SOURCE_-HV_A: 
M2_SOURCE_-HV_B: 
M2_SYNC_N: 
M2_SYNC_P: 
pads on no net: FID1.1 FID1.2 FID2.1 FID2.2 FID3.1 FID3.2 FID4.1 FID4.2 FID5.1 FID5.2 FID6.1 FID6.2

## Polygon pours and split planes (outlines as drawn)
GND on GND_1 (split plane): 279.49,0.51 0.51,0.51 0.51,154.49 279.49,154.49
GND on GND_1 (split plane): 79.998,1.574 77.623,1.574 77.623,3.949 79.998,3.949
M2_1V8_ANALOG on GND_2 (split plane): 279.49,0.51 0.51,0.51 0.51,154.49 279.49,154.49
M2_1V8_ANALOG on GND_2 (split plane): 84.498,1.592 82.123,1.592 82.123,3.967 84.498,3.967
no net on GND_2 (split plane): 83.786,2.154 82.908,2.154 82.908,3.422 83.786,3.422
GND on PWR (split plane): 279.49,0.51 0.51,0.51 0.51,154.49 279.49,154.49
GND on PWR (split plane): 86.748,1.592 84.373,1.592 84.373,3.967 86.748,3.967
GND on PWR (split plane): 86.026,2.144 85.181,2.144 85.181,3.422 86.026,3.422
GND on GND_3 (split plane): 279.49,0.51 0.51,0.51 0.51,154.49 279.49,154.49
GND on GND_3 (split plane): 91.248,1.592 88.873,1.592 88.873,3.967 91.248,3.967
GND on GND_3 (split plane): 90.521,2.144 89.726,2.144 89.726,3.422 90.521,3.422

## Other copper
Top:
  text "LAYER 1: TOP" at 425.513,137.471 h2.54
Signal_1:
  text "LAYER 3: SIG_1" at 425.513,128.79 h2.54
Signal_2:
  text "LAYER 6: SIG_2" at 425.513,115.767 h2.54
Bottom:
  text "LAYER 8: BOTTOM" at 425.513,107.086 h2.54
GND_1 (plane layer: these items are gaps in the copper):
  text "LAYER 2: GND_1" at 425.513,133.13 h2.54
GND_2 (plane layer: these items are gaps in the copper):
  rectangle: 74,0.592 74.347,4.092
  rectangle: 73.573,0.592 73.746,4.092
  rectangle: 74.499,0.592 74.822,4.092
  rectangle: 74.924,0.592 75.248,4.092
  rectangle: 75.248,1.467 82.009,4.092
  region: 84.623,1.467 84.623,1.592 81.998,1.592 81.998,1.467
  region: 84.623,3.967 84.623,4.092 81.998,4.092 81.998,3.967
  rectangle: 81.998,1.467 82.123,4.092
  rectangle: 84.498,0.592 84.873,4.092
  region: 82.248,2.154 82.248,1.717 84.373,1.717 84.373,2.154
  rectangle: 82.248,1.717 82.908,3.842
  region: 84.373,3.842 83.786,3.842 83.786,1.717 84.373,1.717
  region: 84.373,3.422 84.373,3.842 82.248,3.842 82.248,3.422
  text "LAYER 4: GND_2" at 425.513,124.449 h2.54
  text "4" at 83.004,2.259 h1.52
PWR (plane layer: these items are gaps in the copper):
  text "LAYER 5: PWR" at 425.513,120.108 h2.54
  text "5" at 85.255,2.259 h1.52
GND_3 (plane layer: these items are gaps in the copper):
  text "LAYER 7: GND_3" at 425.513,111.427 h2.54
  text "7" at 89.829,2.289 h1.52

## Silkscreen, mask and mechanical layers (free items; w line width, h text height)
Top Overlay:
  text "TOP SILKSCREEN" at 425.513,146.153 h2.54
Bottom Overlay:
  text "BOTTOM SILKSCREEN" at 425.513,98.404 h2.54
Top Paste:
  text "354 MM" at 81.464,280.608 h3
  text "TOP PASTEMASK" at 425.513,63.035 h2.54
  text "438 MM" at -87.286,52.358 h3 r90
  text "Revision" at 105.816,-119.971 h6.48
  text "Revision" at -0.536,-151.4 h2
  text "TOP" at 204.269,-154.161 h4
  text ".Project_Revision" at -0.524,-156.037 h2
  text ".Project_Name" at -48.236,-156.862 h2
  text "STENCIL THICKNESS -" at 59.485,-180.961 h6.5
  text ".Project_Stencil_Top_Thickness" at 34.658,-181.582 h6.5
  text "DO NOT MODIFY STENCIL" at 21.519,-195.381 h6.5
Bottom Paste:
  text "BOTTOM PASTEMASK" at 425.513,36.424 h2.54
Top Solder:
  text "TOP SOLDERMASK" at 425.513,141.812 h2.54
Bottom Solder:
  text "BOTTOM SOLDERMASK" at 425.513,102.745 h2.54
Top Assembly:
  text "TOP ASSEMBLY" at 425.513,58.62 h2.54
Bottom Assembly:
  text "BOTTOM ASSEMBLY" at 425.513,32.145 h2.54
Top Designators:
  text "TOP DESIGNATORS" at 425.513,54.341 h2.54
Bottom Designators:
  text "BOTTOM DESIGNATORS" at 425.513,23.587 h2.54
Board Outline:
  text "BOARD OUTLINE" at 425.513,87.636 h2.54
Panel Outline:
  the board outline again, w0.05
  text "PANEL OUTLINE" at 425.513,83.357 h2.54
Route Tool Path:
  lines w2.54: 71.12,0 95.25,0 ; 135,20 135,140
  text "100 MIL ROUTER" at -17.722,148.028 h2
  text "100 MIL ROUTER" at 285.123,145.609 h2
  text "ROUTE TOOL PATH" at 425.513,79.078 h2.54
  text "100 MIL ROUTER" at -18.717,7.135 h2
  text "100 MIL ROUTER" at 285.537,4.048 h2
Panel V-Grove:
  lines w0.127: 10,-5 10,165 ; 120,-5 120,165 ; 135,-5 135,165 ; 150,-5 150,165 ; 201.962,-5 201.962,165 ; 215,-5 215,165 ; 266.962,-5 266.962,165
  text "PANEL V-GROOVE" at 425.513,74.799 h2.54
  text "V-GROOVE" at 109.694,-8.095 h2
  text "V-GROOVE" at 127.009,-8.483 h2
  text "V-GROOVE" at 193.971,-8.483 h2
  text "V-GROOVE" at 259.445,-8.481 h2
  text "V-GROOVE" at 1.598,-8.795 h2
  text "V-GROOVE" at 142.135,-11.577 h2
  text "V-GROOVE" at 208.719,-12.12 h2
Manufacturing Notes:
  text "MANUFACTURING NOTES" at 425.513,15.029 h2.54
  text "Preserve Stacking Stripes Integrity during Router Tooling" at 76.873,-7.908 h1
Top 3D Models:
  text "TOP 3D MODELS" at 425.513,45.783 h2.54
Bottom 3D Models:
  text "BOTTOM 3D MODELS" at 425.513,19.308 h2.54
Top Courtyard:
  text "TOP COURTYARD" at 425.513,50.062 h2.54
Bottom Courtyard:
  text "BOTTOM COURTYARD" at 425.513,27.866 h2.54
Drill Drawing:
  drawing of 185 lines, arcs and shapes, not listed
  text "DRILL DRAWING" at 425.513,71.037 h2.54
  text "Symbol" at 427.524,-1.913 h1.83
  text "Count" at 440.374,-1.913 h1.83
  text "Hole Size" at 457.133,-1.913 h1.83
  text "Plated" at 488.112,-1.913 h1.83
  text "Hole Type" at 500.961,-1.913 h1.83
  text "Drill Layer Pair" at 519.6,-1.913 h1.83
  text "Via/Pad" at 549.817,-1.913 h1.83
  text "Pad Shape" at 564.799,-1.913 h1.83
  text "2992" at 440.374,-5.723 h1.52
  text "7,874mil (0,200mm)" at 457.133,-5.723 h1.52
  text "PTH" at 488.112,-5.723 h1.52
  text "Round" at 500.961,-5.723 h1.52
  text "Top - Bottom" at 519.6,-5.723 h1.52
  text "Via" at 549.817,-5.723 h1.52
  text "Rounded" at 564.799,-5.723 h1.52
  text "D" at 426.785,-5.977 h1.69
  text "48" at 440.374,-9.533 h1.52
  text "9,842mil (0,250mm)" at 457.133,-9.533 h1.52
  text "PTH" at 488.112,-9.533 h1.52
  text "Round" at 500.961,-9.533 h1.52
  text "Top - Bottom" at 519.6,-9.533 h1.52
  text "Via" at 549.817,-9.533 h1.52
  text "Rounded" at 564.799,-9.533 h1.52
  text "E" at 426.785,-9.787 h1.69
  text "44" at 440.374,-13.343 h1.52
  text "19,685mil (0,500mm)" at 457.133,-13.343 h1.52
  text "PTH" at 488.112,-13.343 h1.52
  text "Slot" at 500.961,-13.343 h1.52
  text "Top - Bottom" at 519.6,-13.343 h1.52
  text "Pad" at 549.817,-13.343 h1.52
  text "Rounded" at 564.799,-13.343 h1.52
  text "2" at 440.374,-17.153 h1.52
  text "19,685mil (0,500mm)" at 457.133,-17.153 h1.52
  text "PTH" at 488.112,-17.153 h1.52
  text "Slot" at 500.961,-17.153 h1.52
  text "Top - Bottom" at 519.6,-17.153 h1.52
  text "Pad" at 549.817,-17.153 h1.52
  text "Rounded Rectangle" at 564.799,-17.153 h1.52
  text "A" at 426.785,-17.407 h1.69
  text "11" at 440.374,-20.963 h1.52
  text "25,591mil (0,650mm)" at 457.133,-20.963 h1.52
  text "NPTH" at 488.112,-20.963 h1.52
  text "Round" at 500.961,-20.963 h1.52
  text "Top - Bottom" at 519.6,-20.963 h1.52
  text "Pad" at 549.817,-20.963 h1.52
  text "Rounded" at 564.799,-20.963 h1.52
  text "11" at 440.374,-24.773 h1.52
  text "25,591mil (0,650mm)" at 457.133,-24.773 h1.52
  text "PTH" at 488.112,-24.773 h1.52
  text "Slot" at 500.961,-24.773 h1.52
  text "Top - Bottom" at 519.6,-24.773 h1.52
  text "Pad" at 549.817,-24.773 h1.52
  text "Rounded" at 564.799,-24.773 h1.52
  text "20" at 440.374,-28.583 h1.52
  text "27,559mil (0,700mm)" at 457.133,-28.583 h1.52
  text "PTH" at 488.112,-28.583 h1.52
  text "Round" at 500.961,-28.583 h1.52
  text "Top - Bottom" at 519.6,-28.583 h1.52
  text "Pad" at 549.817,-28.583 h1.52
  text "Rounded" at 564.799,-28.583 h1.52
  text "30" at 440.374,-32.393 h1.52
  text "30,000mil (0,762mm)" at 457.133,-32.393 h1.52
  text "NPTH" at 488.112,-32.393 h1.52
  text "Round" at 500.961,-32.393 h1.52
  text "Top - Bottom" at 519.6,-32.393 h1.52
  text "Pad" at 549.817,-32.393 h1.52
  text "Rounded" at 564.799,-32.393 h1.52
  text "10" at 440.374,-36.203 h1.52
  text "31,000mil (0,787mm)" at 457.133,-36.203 h1.52
  text "PTH" at 488.112,-36.203 h1.52
  text "Round" at 500.961,-36.203 h1.52
  text "Top - Bottom" at 519.6,-36.203 h1.52
  text "Pad" at 549.817,-36.203 h1.52
  text "(Mixed)" at 564.799,-36.203 h1.52
  text "G" at 426.785,-36.457 h1.69
  text "3" at 440.374,-40.013 h1.52
  text "31,496mil (0,800mm)" at 457.133,-40.013 h1.52
  text "PTH" at 488.112,-40.013 h1.52
  text "Slot" at 500.961,-40.013 h1.52
  text "Top - Bottom" at 519.6,-40.013 h1.52
  text "Pad" at 549.817,-40.013 h1.52
  text "Rounded" at 564.799,-40.013 h1.52
  text "20" at 440.374,-43.823 h1.52
  text "31,890mil (0,810mm)" at 457.133,-43.823 h1.52
  text "PTH" at 488.112,-43.823 h1.52
  text "Round" at 500.961,-43.823 h1.52
  text "Top - Bottom" at 519.6,-43.823 h1.52
  text "Pad" at 549.817,-43.823 h1.52
  text "(Mixed)" at 564.799,-43.823 h1.52
  text "B" at 426.785,-44.077 h1.69
  text "8" at 440.374,-47.633 h1.52
  text "35,433mil (0,900mm)" at 457.133,-47.633 h1.52
  text "PTH" at 488.112,-47.633 h1.52
  text "Round" at 500.961,-47.633 h1.52
  text "Top - Bottom" at 519.6,-47.633 h1.52
  text "Pad" at 549.817,-47.633 h1.52
  text "Rounded" at 564.799,-47.633 h1.52
  text "26" at 440.374,-51.443 h1.52
  text "39,370mil (1,000mm)" at 457.133,-51.443 h1.52
  text "PTH" at 488.112,-51.443 h1.52
  text "Round" at 500.961,-51.443 h1.52
  text "Top - Bottom" at 519.6,-51.443 h1.52
  text "Pad" at 549.817,-51.443 h1.52
  text "(Mixed)" at 564.799,-51.443 h1.52
  text "18" at 440.374,-55.253 h1.52
  text "40,000mil (1,016mm)" at 457.133,-55.253 h1.52
  text "PTH" at 488.112,-55.253 h1.52
  text "Round" at 500.961,-55.253 h1.52
  text "Top - Bottom" at 519.6,-55.253 h1.52
  text "Pad" at 549.817,-55.253 h1.52
  text "(Mixed)" at 564.799,-55.253 h1.52
  text "4" at 440.374,-59.063 h1.52
  text "41,000mil (1,041mm)" at 457.133,-59.063 h1.52
  text "PTH" at 488.112,-59.063 h1.52
  text "Round" at 500.961,-59.063 h1.52
  text "Top - Bottom" at 519.6,-59.063 h1.52
  text "Pad" at 549.817,-59.063 h1.52
  text "Rounded" at 564.799,-59.063 h1.52
  text "2" at 440.374,-62.873 h1.52
  text "42,913mil (1,090mm)" at 457.133,-62.873 h1.52
  text "PTH" at 488.112,-62.873 h1.52
  text "Round" at 500.961,-62.873 h1.52
  text "Top - Bottom" at 519.6,-62.873 h1.52
  text "Pad" at 549.817,-62.873 h1.52
  text "Rounded" at 564.799,-62.873 h1.52
  text "F" at 426.785,-63.127 h1.69
  text "2" at 440.374,-66.683 h1.52
  text "51,181mil (1,300mm)" at 457.133,-66.683 h1.52
  text "PTH" at 488.112,-66.683 h1.52
  text "Round" at 500.961,-66.683 h1.52
  text "Top - Bottom" at 519.6,-66.683 h1.52
  text "Pad" at 549.817,-66.683 h1.52
  text "(Mixed)" at 564.799,-66.683 h1.52
  text "C" at 426.785,-66.937 h1.69
  text "8" at 440.374,-70.493 h1.52
  text "62,992mil (1,600mm)" at 457.133,-70.493 h1.52
  text "PTH" at 488.112,-70.493 h1.52
  text "Round" at 500.961,-70.493 h1.52
  text "Top - Bottom" at 519.6,-70.493 h1.52
  text "Pad" at 549.817,-70.493 h1.52
  text "Rounded" at 564.799,-70.493 h1.52
  text "2" at 440.374,-74.303 h1.52
  text "63,000mil (1,600mm)" at 457.133,-74.303 h1.52
  text "PTH" at 488.112,-74.303 h1.52
  text "Round" at 500.961,-74.303 h1.52
  text "Top - Bottom" at 519.6,-74.303 h1.52
  text "Pad" at 549.817,-74.303 h1.52
  text "Rounded" at 564.799,-74.303 h1.52
  text "6" at 440.374,-78.113 h1.52
  text "72,835mil (1,850mm)" at 457.133,-78.113 h1.52
  text "PTH" at 488.112,-78.113 h1.52
  text "Round" at 500.961,-78.113 h1.52
  text "Top - Bottom" at 519.6,-78.113 h1.52
  text "Pad" at 549.817,-78.113 h1.52
  text "(Mixed)" at 564.799,-78.113 h1.52
  text "2" at 440.374,-81.923 h1.52
  text "128,000mil (3,251mm)" at 457.133,-81.923 h1.52
  text "PTH" at 488.112,-81.923 h1.52
  text "Round" at 500.961,-81.923 h1.52
  text "Top - Bottom" at 519.6,-81.923 h1.52
  text "Pad" at 549.817,-81.923 h1.52
  text "Rounded" at 564.799,-81.923 h1.52
  text "15" at 440.374,-85.733 h1.52
  text "129,921mil (3,300mm)" at 457.133,-85.733 h1.52
  text "PTH" at 488.112,-85.733 h1.52
  text "Round" at 500.961,-85.733 h1.52
  text "Top - Bottom" at 519.6,-85.733 h1.52
  text "Pad" at 549.817,-85.733 h1.52
  text "Rounded" at 564.799,-85.733 h1.52
  text "2" at 440.374,-89.543 h1.52
  text "166,142mil (4,220mm)" at 457.133,-89.543 h1.52
  text "PTH" at 488.112,-89.543 h1.52
  text "Round" at 500.961,-89.543 h1.52
  text "Top - Bottom" at 519.6,-89.543 h1.52
  text "Pad" at 549.817,-89.543 h1.52
  text "Rounded" at 564.799,-89.543 h1.52
  text "H" at 426.785,-89.797 h1.69
  text "3286 Total" at 440.374,-93.353 h1.52
  text "Slot definitions :" at 427.524,-97.036 h1.52
  text "Routed Path Length" at 453.755,-97.036 h1.52
  text "= Calculated from tool start centre position to tool end centre position." at 481.762,-97.036 h1.52
  text "Hole Length" at 453.755,-99.575 h1.52
  text "= Routed Path Length + Tool Size = Slot length as defined in the PCB layout" at 471.352,-99.575 h1.52

## Panel: embedded boards
"..\..\..\04 - BEE_BOARD\01 - SCHEMAS ET PCB\99 - WORKING COPY\BEE_BOARD.PcbDoc" at 266.962,18.171, 1 rows x 1 columns, spacing 62.245 x 62.113, rotation 90
"..\..\..\04 - BEE_BOARD\01 - SCHEMAS ET PCB\99 - WORKING COPY\BEE_BOARD.PcbDoc" at 201.962,18.171, 1 rows x 2 columns, spacing 62.245 x 67.113, rotation 90
"..\..\..\05 - USB-C BREAKOUT\01 - SCHEMAS ET PCB\99 - WORKING COPY\USB-C_BREAKOUT.PcbDoc" at 215,97, 1 rows x 1 columns, spacing 62.245 x 62.113, rotation 0
"HIVE_BOARD.PcbDoc" at 10,25, 1 rows x 1 columns, spacing 63.5 x 33.46, rotation 0

## Text inside footprints (layer, text, board x,y; h text height)
Designator19: Top Paste "STENCIL THICKNESS -" at 291.459,-28.47 h0.89; Top Paste "Half-Etched  / Lasered Text / DO NOT REMOVE" at 322.726,-55.928 h3.81; Top Paste "FRAME SIZE - 420 x 520 mm" at 69.217,243.43 h6.5; Top Paste "TOP" at 296,-32.586 h2.54; Top Paste "STENCIL THICKNESS -" at 71.79,-89.393 h6.5; Top Paste "PCB Revision" at 296.304,-26.33 h0.89; Top Paste "TOP" at 322.491,-121.326 h6.48; Top Paste "VALID AREA - 240 x 340 mm" at 66.677,-51.21 h6.5
Designator41: Manufacturing Notes "Preserve Stacking Stripes Integrity during Router Tooling" at 77.076,-4.341 h1; Top "1" at 76.298,2.142 h2
Designator42: Bottom "8" at 92.773,2.142 h2
Designator46: GND_2 "3" at 80.726,2.144 h2
Designator46: GND_1 "2" at 78.448,2.124 h2
Designator47: PWR "4" at 82.903,2.144 h2
Designator48: Signal_1 "3" at 80.69,2.107 h2
Designator49: GND_3 "6" at 87.436,2.159 h2
Designator51: Signal_2 "6" at 87.367,2.122 h2
FID1: Top Paste "STENCIL / FIDUCIAL / HALF-ETCHED" at 12.092,9.481 h0.76; Bottom Paste "STENCIL / FIDUCIAL / HALF-ETCHED" at 20.22,9.481 h0.76
FID2: Top Paste "STENCIL / FIDUCIAL / HALF-ETCHED" at 50.554,139.773 h0.76; Bottom Paste "STENCIL / FIDUCIAL / HALF-ETCHED" at 58.682,139.773 h0.76
FID3: Top Paste "STENCIL / FIDUCIAL / HALF-ETCHED" at 101.078,17.589 h0.76; Bottom Paste "STENCIL / FIDUCIAL / HALF-ETCHED" at 109.206,17.589 h0.76
FID4: Top Paste "STENCIL / FIDUCIAL / HALF-ETCHED" at 219.708,8.024 h0.76; Bottom Paste "STENCIL / FIDUCIAL / HALF-ETCHED" at 227.836,8.024 h0.76
FID5: Top Paste "STENCIL / FIDUCIAL / HALF-ETCHED" at 146.217,82.608 h0.76; Bottom Paste "STENCIL / FIDUCIAL / HALF-ETCHED" at 154.345,82.608 h0.76
FID6: Top Paste "STENCIL / FIDUCIAL / HALF-ETCHED" at 246.296,144.559 h0.76; Bottom Paste "STENCIL / FIDUCIAL / HALF-ETCHED" at 254.424,144.559 h0.76